# Altium PCB PCB_Template.PcbDoc
Units mm, origin at the board's own origin, x right, y up, seen from the top; angles counter-clockwise.
Board outline 116 x 92 mm, 2 copper layers (Top Layer, Bottom Layer); 107 components, 63 nets, 374 pads, 0 vias.
Unrouted connection lines stored in the file: 234.
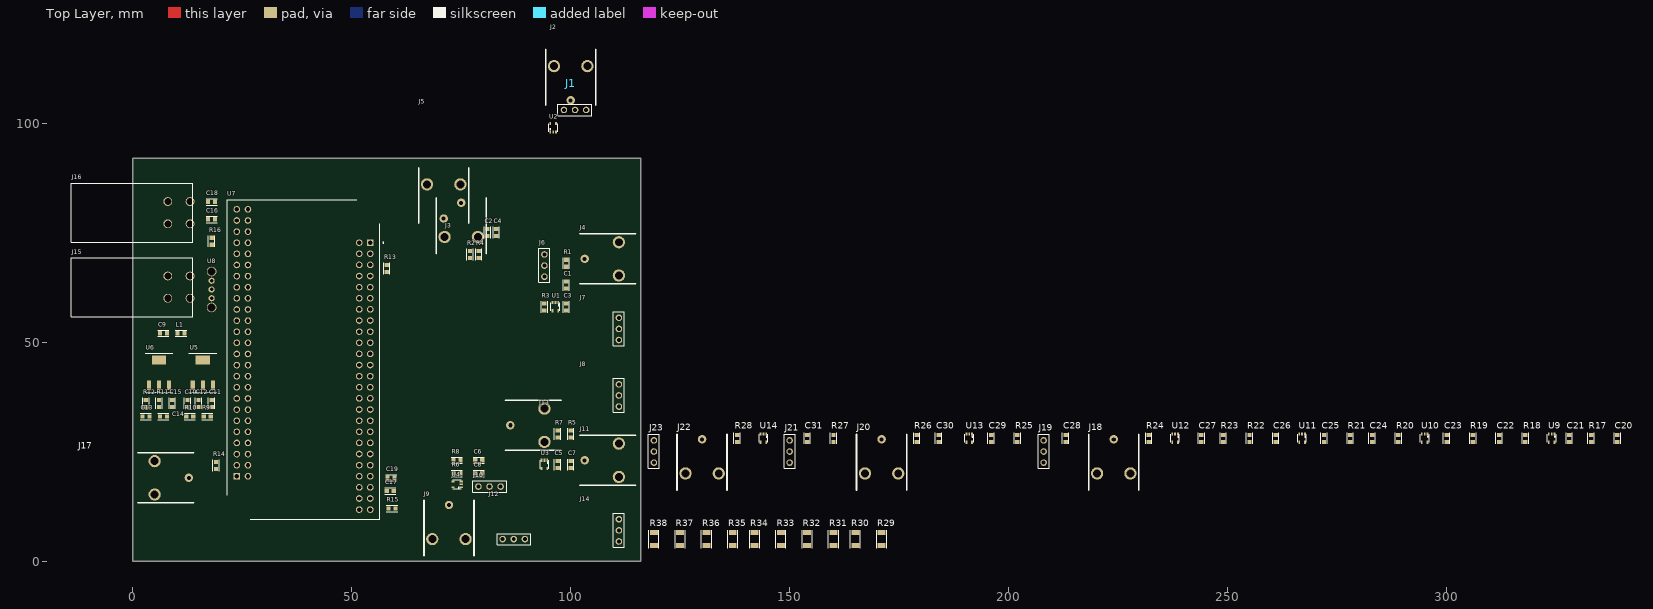
[diagram p0: Top Layer view]
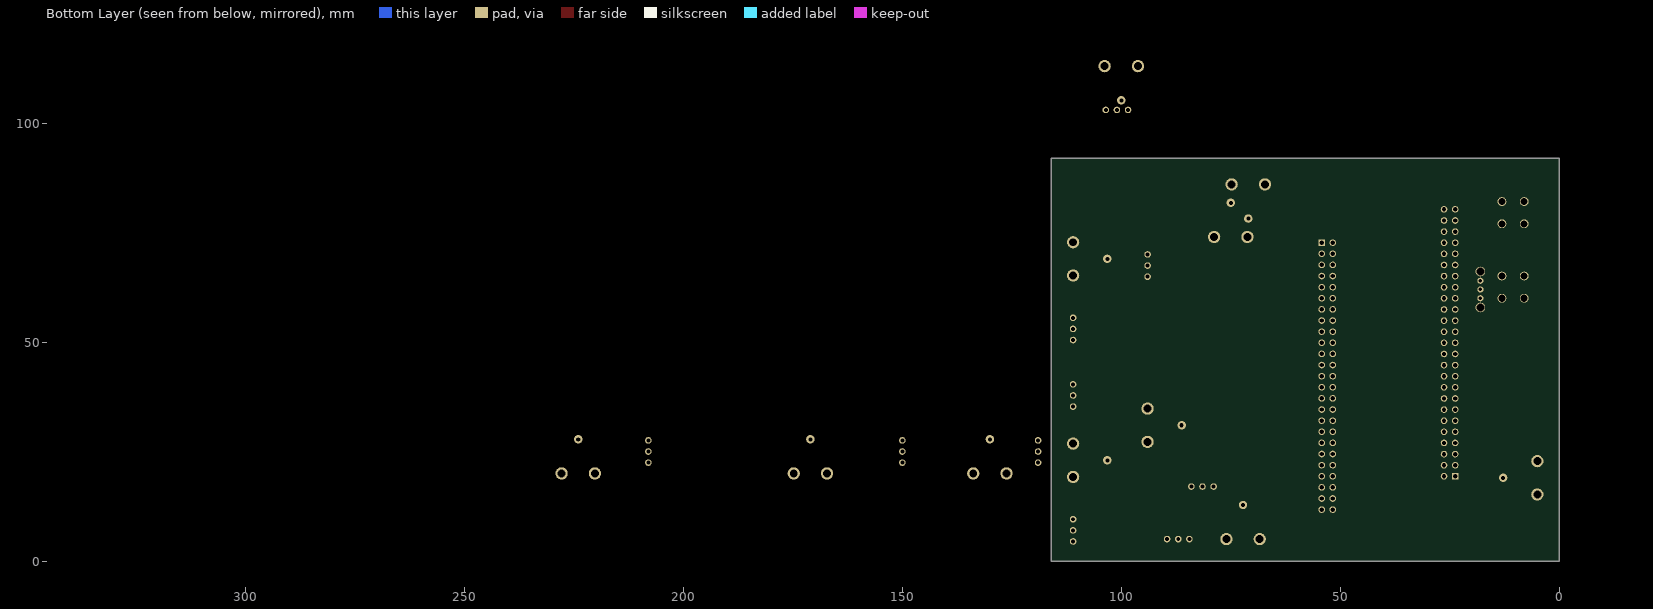
[diagram p1: Bottom Layer view, seen from below]

## Layer stack, top to bottom
Top Solder: solder mask 0.0102, Solder Resist, Dk 3.5
Top Layer: signal copper 0.0356
Dielectric 1: dielectric 0.32, FR-4, Dk 4.8
Bottom Layer: signal copper 0.0356
Bottom Solder: solder mask 0.0102, Solder Resist, Dk 3.5

## Board outline
0,0 116,0 116,92 0,92

## Design rules (kind name [scope] priority, off if disabled: settings)
Clearance [All] p1: gap=0.254 ignorepadtopadclearanceinfootprint=FALSE except(0: Arc-Hole Track-Hole SMDPad-Hole THPad-Hole Via-Hole Fill-Hole Poly-Hole Region-Hole Text-Hole)
PolygonConnect [All] p1: connectstyle=Relief reliefconductorwidth=0.254 reliefentries=4 polygonreliefangle="90 Angle" airgapwidth=0.254
RoomDefinition Amplifier [InComponentClass('Amplifier')] p1: confinementstyle=ConfineIn formatcopy=TRUE lockcomponents=FALSE outline 117,2 343,2 343,33 117,33
RoutingVias [All] p1: holewidth=0.711 width=1.27 viastyle="Through Hole" minholewidth=0.711 minwidth=1.27 maxholewidth=0.711 maxwidth=1.27
SolderMaskExpansion [All] p1: expansion=0.102
Width [All] p1: maxlimit=0.254 minlimit=0.254 preferedwidth=0.254
30 further rules are at their usual default settings.

## Classes and differential pairs
component class FPGA_Socket: C16 C17 C18 C19 J17 R13 R14 R15 R16 U7
component class Power: C9 C10 C11 C12 C13 C14 C15 J15 J16 L1 R9 R10 R11 R12 U5 U6 U8
component class Amplifier: C1 C2 C3 C4 C5 C6 C7 C8 C20 C21 C22 C23 C24 C25 C26 C27 C28 C29 C30 C31 J1 J2 J3 J4 J5 J6 J7 J8 J9 J10 J11 J12 J13 J14 J18 J19 J20 J21 J22 J23 R1 R2 R3 R4 R5 R6 R7 R8 R17 R18 R19 R20 R21 R22 R23 R24 R25 R26 R27 R28 R29 R30 R31 R32 R33 R34 R35 R36 R37 R38 U1 U2 U3 U4 U9 U10 U11 U12 U13 U14

## Components (designator, comment, footprint, x,y, rotation, side; value= is the part's Value field where it differs from the comment)
C1 "10uF" 0603C 99,63 r90 top
C2 "10uF" 0603C 81,75 r270 top
C3 "0.1uF" 0603C 99,58 r90 top
C4 "0.1uF" 0603C 83.001,75 r270 top
C5 "10uF" 0603C 97,22 r90 top
C6 "10uF" 0603C 79,23 r0 top
C7 "0.1uF" 0603C 100,22 r90 top
C8 "0.1uF" 0603C 79,20 r0 top
C9 "10nF" 0603C 7,52 r180 top
C10 "0.1uF" 0603C 12.5,36 r90 top
C11 "10uF" 0603C 18,36 r90 top
C12 "1uF" 0603C 15,36 r90 top
C13 "0.1uF" 0603C 3,33 r180 top
C14 "10uF" 0603C 7,33 r180 top
C15 "1uF" 0603C 9,36 r90 top
C16 "10uF" 0603C 18,78 r180 top
C17 "10uF" 0603C 58.8,16 r180 top
C18 "0.1uF" 0603C 18,82 r180 top
C19 "0.1uF" 0603C 59,19 r180 top
C20 "10uF" 0603C 339,28 r90 top
C21 "0.1uF" 0603C 328,28 r90 top
C22 "10uF" 0603C 312,28 r90 top
C23 "0.1uF" 0603C 300,28 r90 top
C24 "10uF" 0603C 283,28 r90 top
C25 "0.1uF" 0603C 272,28 r90 top
C26 "10uF" 0603C 261,28 r90 top
C27 "0.1uF" 0603C 244,28 r90 top
C28 "10uF" 0603C 213,28 r90 top
C29 "0.1uF" 0603C 196,28 r90 top
C30 "10uF" 0603C 184,28 r90 top
C31 "0.1uF" 0603C 154,28 r90 top
J1 "0731000105" 0731000105 100,113 r180 top
J2 "3-PoS Header 2.54mm" "3-POS 2.54mm Pitch Header - duplicate" 101,103 r180 top
J3 "0731000105" 0731000105 75,74 r0 top
J4 "0731000105" 0731000105 111,69 r90 top
J5 "0731000105" 0731000105 71,86 r180 top
J6 "3-PoS Header 2.54mm" "3-POS 2.54mm Pitch Header - duplicate" 94,67.46 r90 top
J7 "3-PoS Header 2.54mm" "3-POS 2.54mm Pitch Header - duplicate" 111,53 r90 top
J8 "3-PoS Header 2.54mm" "3-POS 2.54mm Pitch Header - duplicate" 111,37.8 r90 top
J9 "0731000105" 0731000105 72.2,5 r0 top
J10 "3-PoS Header 2.54mm" "3-POS 2.54mm Pitch Header - duplicate" 81.46,17 r0 top
J11 "0731000105" 0731000105 111,23 r90 top
J12 "3-PoS Header 2.54mm" "3-POS 2.54mm Pitch Header - duplicate" 87,5 r0 top
J13 "0731000105" 0731000105 94,31 r90 top
J14 "3-PoS Header 2.54mm" "3-POS 2.54mm Pitch Header - duplicate" 111,7 r90 top
J15 "CT3151-0/2" CT3151-0/2 10,62.78 r0 top
J16 "CT3151-0/2" CT3151-0/2 10,79.78 r0 top
J17 "0731000105" 0731000105 5,19 r270 top
J18 "0731000105" 0731000105 224,20 r0 top
J19 "3-PoS Header 2.54mm" "3-POS 2.54mm Pitch Header - duplicate" 208,25 r90 top
J20 "0731000105" 0731000105 171,20 r0 top
J21 "3-PoS Header 2.54mm" "3-POS 2.54mm Pitch Header - duplicate" 150,25 r90 top
J22 "0731000105" 0731000105 130,20 r0 top
J23 "3-PoS Header 2.54mm" "3-POS 2.54mm Pitch Header - duplicate" 119,25 r90 top
L1 "10nH" 0603C 11,52 r180 top
R1 "12.4k" 0603C 99,68 r90 top
R2 "12.4k" 0603C 77,70 r270 top
R3 "12.4k" 0603C 94,58 r90 top
R4 "12.4k" 0603C 79,70 r270 top
R5 "12.4k" 0603C 100,29 r90 top
R6 "12.4k" 0603C 74,20 r0 top
R7 "12.4k" 0603C 97,29 r90 top
R8 "12.4k" 0603C 74,23 r0 top
R9 "10k" 0603C 17,33 r180 top
R10 "10k" 0603C 13,33 r180 top
R11 "10k" 0603C 6,36 r90 top
R12 "10k" 0603C 3,36 r90 top
R13 "0" 0603C 58,66.8 r90 top
R14 "0" 0603C 19,21.8 r270 top
R15 "0" 0603C 59.2,12 r0 top
R16 "0" 0603C 18,73 r90 top
R17 "12.4k" 0603C 333,28 r90 top
R18 "12.4k" 0603C 318,28 r90 top
R19 "12.4k" 0603C 306,28 r90 top
R20 "12.4k" 0603C 289,28 r90 top
R21 "12.4k" 0603C 278,28 r90 top
R22 "12.4k" 0603C 255,28 r90 top
R23 "12.4k" 0603C 249,28 r90 top
R24 "12.4k" 0603C 232,28 r90 top
R25 "12.4k" 0603C 202,28 r90 top
R26 "12.4k" 0603C 179,28 r90 top
R27 "12.4k" 0603C 160,28 r90 top
R28 "12.4k" 0603C 138,28 r90 top
R29 "0" 1206C 171,5 r90 top
R30 "0" 1206C 165,5 r90 top
R31 "0" 1206C 160,5 r90 top
R32 "0" 1206C 154,5 r90 top
R33 "0" 1206C 148,5 r90 top
R34 "0" 1206C 142,5 r90 top
R35 "0" 1206C 137,5 r90 top
R36 "0" 1206C 131,5 r90 top
R37 "0" 1206C 125,5 r90 top
R38 "0" 1206C 119,5 r90 top
U1 "MIC920YC5" MIC920 96.499,58 r0 top
U2 "MIC920YC5" MIC920 96,99 r180 top
U3 "MIC920YC5" MIC920 94,22 r0 top
U4 "MIC920YC5" MIC920 74,17.5 r270 top
U5 "LM317DCYR" LM317 16,43 r0 top
U6 "LM317DCYR" LM317 6,43 r0 top
U7 "TE0725-03-35-2C" MODULE_TE0725-03-35-2C 39,46 r90 top
U8 "2 POS Sliding Switch" "2 POS Sliding switch" 18,62 r90 top
U9 "MIC920YC5" MIC920 324,28 r0 top
U10 "MIC920YC5" MIC920 295,28 r0 top
U11 "MIC920YC5" MIC920 267,28 r0 top
U12 "MIC920YC5" MIC920 238,28 r0 top
U13 "MIC920YC5" MIC920 191,28 r0 top
U14 "MIC920YC5" MIC920 144,28 r0 top

## Footprints (in the part's own frame and the unit in brackets; to place one, negate y for a bottom-side part, rotate by r counter-clockwise, add the part's x,y. Pads: shape width x height; smd on the part's side, far side on the other; paste and mask are expansions set on the pad)
"2 POS Sliding switch" [mm]
  round 2.2 hole 1.8: 0(-4.1,0) 0(4.1,0)
  round 1.4 hole 0.8: 1(-2,0) 2(0,0) 3(2,0)
"3-POS 2.54mm Pitch Header - duplicate" [mm] "2.54mm Pitch Header"
  round 1.5 hole 0.9: 1(-2.54,0) 2(0,0) 3(2.54,0)
  silkscreen extent -3.81,-1.27 3.93,1.28
0603C [mm]
  rect 0.95x1 smd: 1(-0.8,0) 2(0.8,0)
  silkscreen extent -1.27,-0.72 1.27,0.72, body extent -0.87,-0.47 0.87,0.47, height 0.9
1206C [mm]
  rect 1.15x1.8 smd: 1(-1.5,0) 2(1.5,0)
  silkscreen extent -2.07,-1.15 2.08,1.15, body extent -1.7,-0.9 1.7,0.9, height 1.9
0731000105 [mm] "BNC Connector Jack, Female Socket 50Ohm Through Hole, Right Angle Solder"
  round 1.92 hole 0.92: 1(0,7.8)
  round 2.8 hole 1.8: 2(-3.8,0) 2(3.8,0)
  silkscreen extent -5.72,-3.81 5.72,8.89
CT3151-0/2 [mm] "CONN BANANA JACK SOLDER"
  round 2 hole 1.6: 1(-2,-2.78) 1(-2,2.3) 1(3.08,-2.78) 1(3.08,2.3)
  silkscreen extent -24,-7 3.7,6.5, body extent -24,-7 3.7,6.5, height 19.25
LM317 [mm]
  rect 0.95x2.15 smd: 1(-2.3,-2.9) 2(0,-2.9) 3(2.3,-2.9)
  rect 3.25x2.15 smd: 2(0,2.9)
  silkscreen extent -3.17,-4.44 3.17,4.44
MIC920 [mm] "General Purpose Amplifier 1 Circuit SC-70-5"
  rect 0.4x0.75 smd mask+0.05: 1(0.65,1.016) 2(0,1.016) 3(-0.65,1.016) 4(-0.65,-0.884) 5(0.65,-0.884)
  silkscreen extent -1,-0.9 1,1
MODULE_TE0725-03-35-2C [mm]
  rect 1.508x1.508 hole 1: 1_1(26.69,-15.24) 1_2(-26.66,15.24)
  round 1.508 hole 1: 2_1(26.69,-12.7) 2_2(-26.66,12.7) 3_1(24.15,-15.24) 3_2(-24.12,15.24) 4_1(24.15,-12.7) 4_2(-24.12,12.7) 5_1(21.61,-15.24) 5_2(-21.58,15.24) 6_1(21.61,-12.7) 6_2(-21.58,12.7) 7_1(19.07,-15.24) 7_2(-19.04,15.24) 8_1(19.07,-12.7) 8_2(-19.04,12.7) 9_1(16.53,-15.24) 9_2(-16.5,15.24) 10_1(16.53,-12.7) 10_2(-16.5,12.7) 11_1(13.99,-15.24) 11_2(-13.96,15.24) 12_1(13.99,-12.7) 12_2(-13.96,12.7) 13_1(11.45,-15.24) 13_2(-11.42,15.24) 14_1(11.45,-12.7) 14_2(-11.42,12.7) 15_1(8.91,-15.24) 15_2(-8.88,15.24) 16_1(8.91,-12.7) 16_2(-8.88,12.7) 17_1(6.37,-15.24) 17_2(-6.34,15.24) 18_1(6.37,-12.7) 18_2(-6.34,12.7) 19_1(3.83,-15.24) 19_2(-3.8,15.24) 20_1(3.83,-12.7) 20_2(-3.8,12.7) 21_1(1.29,-15.24) 21_2(-1.26,15.24) 22_1(1.29,-12.7) 22_2(-1.26,12.7) 23_1(-1.25,-15.24) 23_2(1.28,15.24) 24_1(-1.25,-12.7) 24_2(1.28,12.7) 25_1(-3.79,-15.24) 25_2(3.82,15.24) 26_1(-3.79,-12.7) 26_2(3.82,12.7) 27_1(-6.33,-15.24) 27_2(6.36,15.24) 28_1(-6.33,-12.7) 28_2(6.36,12.7) 29_1(-8.87,-15.24) 29_2(8.9,15.24) 30_1(-8.87,-12.7) 30_2(8.9,12.7) 31_1(-11.41,-15.24) 31_2(11.44,15.24) 32_1(-11.41,-12.7) 32_2(11.44,12.7) 33_1(-13.95,-15.24) 33_2(13.98,15.24) 34_1(-13.95,-12.7) 34_2(13.98,12.7) 35_1(-16.49,-15.24) 35_2(16.52,15.24) 36_1(-16.49,-12.7) 36_2(16.52,12.7) 37_1(-19.03,-15.24) 37_2(19.06,15.24) 38_1(-19.03,-12.7) 38_2(19.06,12.7) 39_1(-21.57,-15.24) 39_2(21.6,15.24) 40_1(-21.57,-12.7) 40_2(21.6,12.7) 41_1(-24.11,-15.24) 41_2(24.14,15.24) 42_1(-24.11,-12.7) 42_2(24.14,12.7) 43_1(-26.65,-15.24) 43_2(26.68,15.24) 44_1(-26.65,-12.7) 44_2(26.68,12.7) 45_1(-29.19,-15.24) 45_2(29.22,15.24) 46_1(-29.19,-12.7) 46_2(29.22,12.7) 47_1(-31.73,-15.24) 47_2(31.76,15.24) 48_1(-31.73,-12.7) 48_2(31.76,12.7) 49_1(-34.27,-15.24) 49_2(34.3,15.24) 50_1(-34.27,-12.7) 50_2(34.3,12.7)
  silkscreen extent -36.45,-18.3 36.45,17.4

## Part data
C1 C2 C3 C4 C5 C6 C7 C8 C10 C11 C12 C13 C14 C15 C16 C17 C18 C19 C20 C21 C22 C23 C24 C25 C26 C27 C28 C29 C30 C31: library part CPoly, "Cap Poly", Power_WV_SRF=35V
C9: library part C, "Capacitor", Power_WV_SRF=25V
J1 J3 J4 J5 J9 J11 J13 J17 J18 J20 J22: "BNC Connector Jack, Female Socket 50Ohm Through Hole, Right Angle Solder"
J2 J6 J7 J8 J10 J12 J14 J19 J21 J23: library part "3-PoS Header"
J15 J16: "CONN BANANA JACK SOLDER BLACK", Package=None, Digi-Key_Part_Number=BKCT3151-0-ND, Digi-Key_Purchase_URL=https://www.digikey.com/product-detail/en/cal-test-electronics/CT3151-0/BKCT3151-0-ND/6005441, MF="Cal Test Electronics", MP="CT3151-0	/2", SnapEDA_Link=CT3151-2
L1: library part L, "Inductor"
R1 R2 R3 R4 R5 R6 R7 R8 R9 R10 R11 R12 R13 R14 R15 R16 R17 R18 R19 R20 R21 R22 R23 R24 R25 R26 R27 R28 R29 R30 R31 R32 R33 R34 R35 R36 R37 R38: library part R, "Resistor", Tolerance=5%
U1 U2 U3 U4 U9 U10 U11 U12 U13 U14: library part MIC920YC5-TR, "General Purpose Amplifier 1 Circuit SC-70-5"
U5 U6: library part LM317
U7: "TE0725 Embedded Module Artix-7 A35T 100MHz 32MB", Package="Trenz Electronic GmbH", Availability=Unavailable, MF="Trenz Electronic GmbH", MP=TE0725-03-35-2C, Price=None, SnapEDA_Link=https://www.snapeda.com/parts/TE0725-03-35-2C/Trenz%20Electronic%20GmbH/view-part/4794770/?ref=snap

## Nets (pads, with @x,y where several pads share a name; then routed paths per layer and width w, separated by ;. In a path a pad name is that pad's centre, name@x,y a point inside that pad or via, vN(x,y) a via of type N, cw(c..) or ccw(c..) an arc to the next point about the centre after c; other vN are vias at no path point)
3V3: C15.1 C16.1 C17.1 C18.1 C19.1 R11.2 R13.1 R14.1 R15.1 R16.1 U6.2 U7.5_1 U7.5_2 U7.46_1 U7.46_2
12V: C9.1 C10.1 C11.1 C13.1 C14.1 L1.2 U5.3 U6.3
GND: C1.2 C2.2 C3.2 C4.2 C5.2 C6.2 C7.2 C8.2 C9.2 C10.2 C11.2 C12.2 C13.2 C14.2 C15.2 C16.2 C17.2 C18.2 C19.2 C20.2 C21.2 C22.2 C23.2 C24.2 C25.2 C26.2 C27.2 C28.2 C29.2 C30.2 C31.2 J2.3 J6.3 J7.3 J8.3 J10.3 J12.3 J14.3 J16.1 J17.2 J19.3 J21.3 J23.3 R3.1 R4.1 R7.1 R8.1 R10.2 R12.2 R18.1 R20.1 R22.1 R24.1 R26.1 R28.1 U1.2 U2.2 U3.2 U4.2 U7.1_1 U7.1_2 U7.2_1 U7.2_2 U7.49_1 U7.49_2 U7.50_1 U7.50_2 U9.2 U10.2 U11.2 U12.2 U13.2 U14.2
NetJ1_1: J1.1 R30.2
NetJ1_2: J1.2 J2.2
NetJ3_1: J3.1 R31.2
NetJ3_2: J3.2 J7.2
NetJ4_1: J4.1 R29.2
NetJ4_2: J4.2 J6.2
NetJ5_1: J5.1 R32.2
NetJ5_2: J5.2 J8.2
NetJ9_1: J9.1 R33.2
NetJ9_2: J9.2 J10.2
NetJ11_1: J11.1 R34.2
NetJ11_2: J11.2 J12.2
NetJ13_1: J13.1 R35.2
NetJ13_2: J13.2 J14.2
NetJ15_1: J15.1 U8.3
NetJ18_1: J18.1 R36.2
NetJ18_2: J18.2 J19.2
NetJ20_1: J20.1 R37.2
NetJ20_2: J20.2 J21.2
NetJ22_1: J22.1 R38.2
NetJ22_2: J22.2 J23.2
NetL1_1: L1.1 U8.2
NetR1_1: R1.1 R3.2 U1.3
NetR1_2: R1.2 R2.2 R5.2 R6.2 R17.2 R19.2 R21.2 R23.2 R25.2 R27.2 U7.28_1
NetR2_1: R2.1 R4.2 U2.3
NetR5_1: R5.1 R7.2 U3.3
NetR6_1: R6.1 R8.2 U4.3
NetR9_1: R9.1 R10.1 U5.1
NetR11_1: R11.1 R12.1 U6.1
NetR13_2: R13.2 U7.6_1
NetR14_2: R14.2 U7.6_2
NetR15_2: R15.2 U7.45_1
NetR16_2: R16.2 U7.45_2
NetR17_1: R17.1 R18.2 U9.3
NetR19_1: R19.1 R20.2 U10.3
NetR21_1: R21.1 R22.2 U11.3
NetR23_1: R23.1 R24.2 U12.3
NetR25_1: R25.1 R26.2 U13.3
NetR27_1: R27.1 R28.2 U14.3
NetR29_1: R29.1 U1.4
NetR30_1: R30.1 U2.4
NetR31_1: R31.1 U3.4
NetR32_1: R32.1 U4.4
NetR33_1: R33.1 U9.4
NetR34_1: R34.1 U10.4
NetR35_1: R35.1 U11.4
NetR36_1: R36.1 U12.4
NetR37_1: R37.1 U13.4
NetR38_1: R38.1 U14.4
NetU1_1: U1.1 U7.8_1
NetU2_1: U2.1 U7.20_1
NetU3_1: U3.1 U7.10_1
NetU4_1: U4.1 U7.22_1
NetU7_12_1: U7.12_1 U9.1
NetU7_14_1: U7.14_1 U10.1
NetU7_16_1: U7.16_1 U12.1
NetU7_18_1: U7.18_1 U14.1
NetU7_24_1: U7.24_1 U11.1
NetU7_26_1: U7.26_1 U13.1
VCC: C1.1 C2.1 C3.1 C4.1 C5.1 C6.1 C7.1 C8.1 C12.1 C20.1 C21.1 C22.1 C23.1 C24.1 C25.1 C26.1 C27.1 C28.1 C29.1 C30.1 C31.1 J2.1 J6.1 J7.1 J8.1 J10.1 J12.1 J14.1 J19.1 J21.1 J23.1 R9.2 U1.5 U2.5 U3.5 U4.5 U5.2 U9.5 U10.5 U11.5 U12.5 U13.5 U14.5
pads on no net: J17.1 U7.3_1 U7.3_2 U7.4_1 U7.4_2 U7.7_1 U7.7_2 U7.8_2 U7.9_1 U7.9_2 U7.10_2 U7.11_1 U7.11_2 U7.12_2 U7.13_1 U7.13_2 U7.14_2 U7.15_1 U7.15_2 U7.16_2 U7.17_1 U7.17_2 U7.18_2 U7.19_1 U7.19_2 U7.20_2 U7.21_1 U7.21_2 U7.22_2 U7.23_1 U7.23_2 U7.24_2 U7.25_1 U7.25_2 U7.26_2 U7.27_1 U7.27_2 U7.28_2 U7.29_1 U7.29_2 U7.30_1 U7.30_2 U7.31_1 U7.31_2 U7.32_1 U7.32_2 U7.33_1 U7.33_2 U7.34_1 U7.34_2 U7.35_1 U7.35_2 U7.36_1 U7.36_2 U7.37_1 U7.37_2 U7.38_1 U7.38_2 U7.39_1 U7.39_2 U7.40_1 U7.40_2 U7.41_1 U7.41_2 U7.42_1 U7.42_2 U7.43_1 U7.43_2 U7.44_1 U7.44_2 U7.47_1 U7.47_2 U7.48_1 U7.48_2 U8.0 U8.1

## Silkscreen, mask and mechanical layers (free items; w line width, h text height)
Mechanical 1:
  the board outline again, w0.1